# Altium PCB control plate ( mill).pcbdoc
Units mm, origin at the board's own origin, x right, y up, seen from the top; angles counter-clockwise.
Board outline 400 x 240 mm, 2 copper layers (Top Layer, Bottom Layer); 16 components, 0 nets, 12 pads, 0 vias.
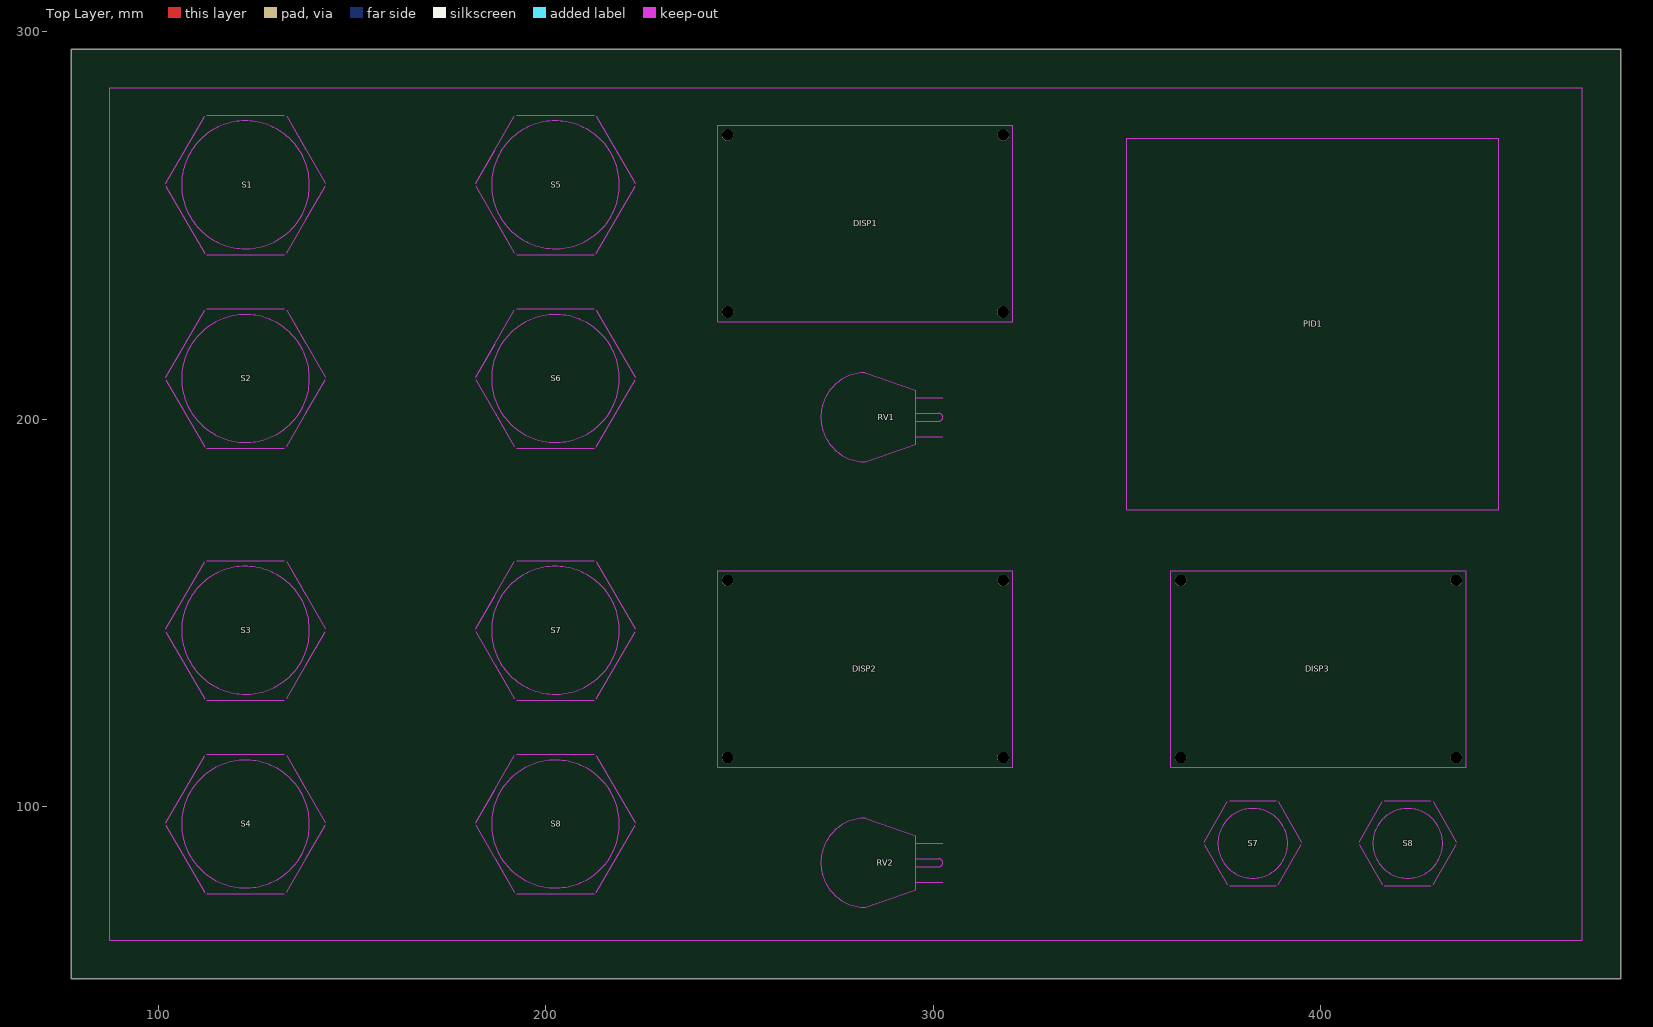
[diagram p0: Top Layer view]
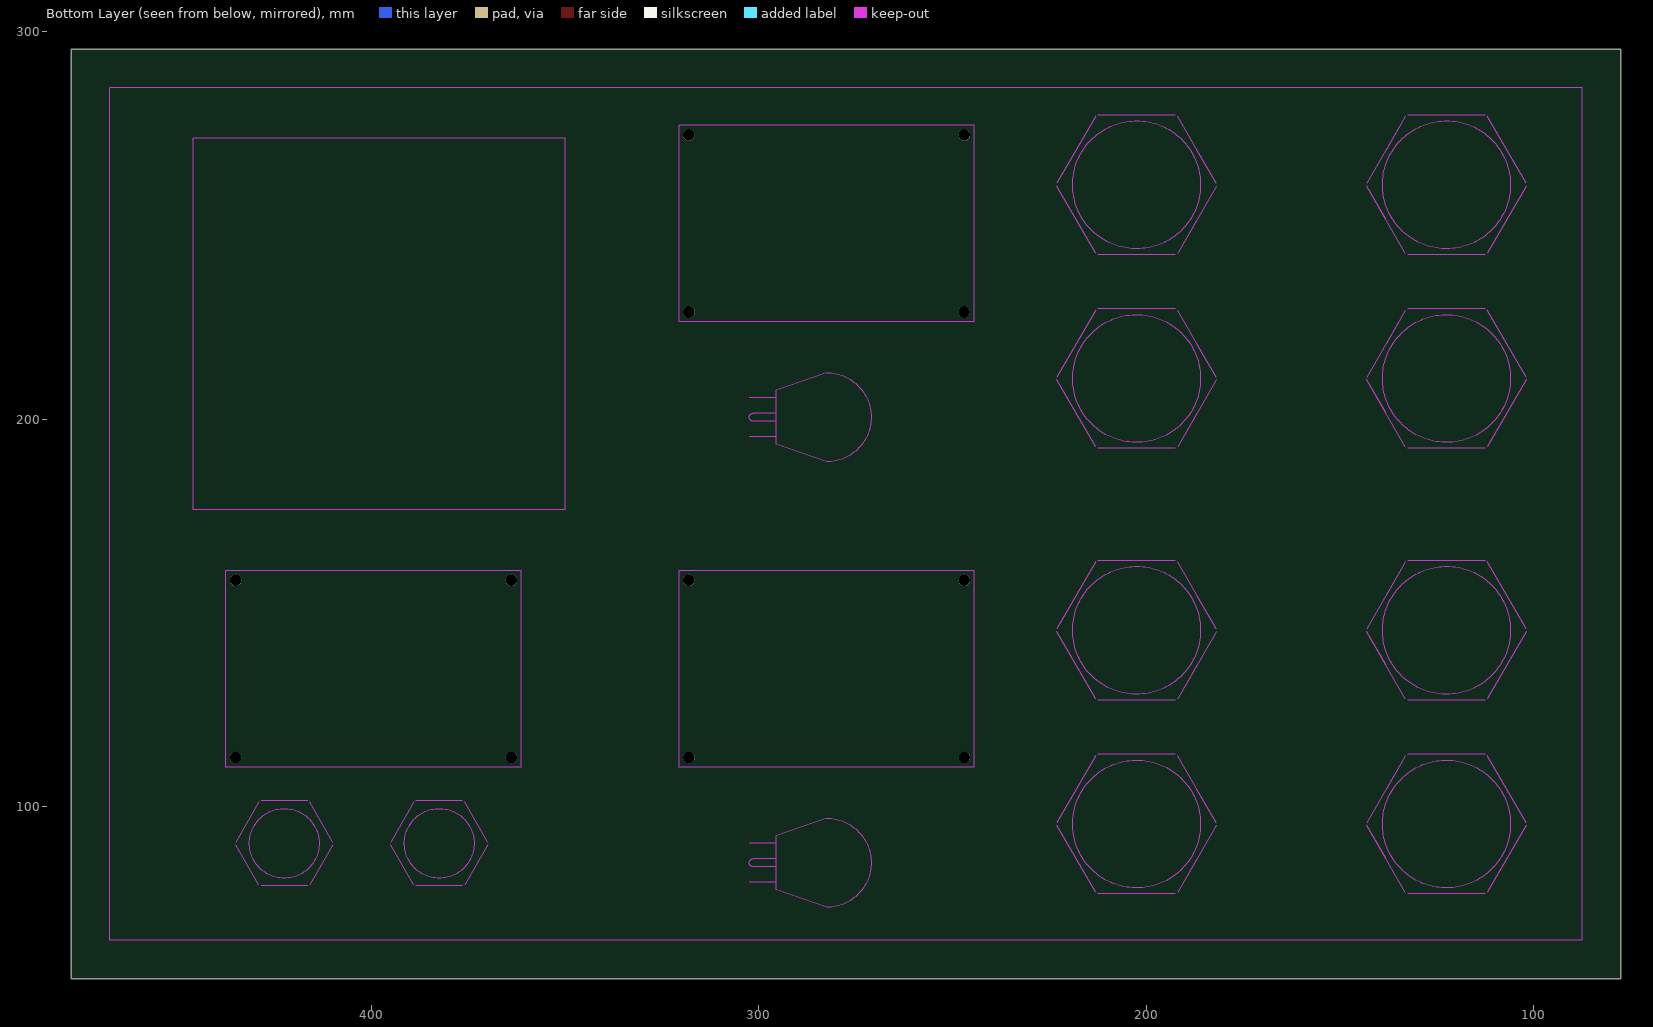
[diagram p1: Bottom Layer view, seen from below]

## Layer stack, top to bottom
Top Layer: signal copper 0.0356
Dielectric: dielectric 0.32, FR-4, Dk 4.8
Bottom Layer: signal copper 0.0356

## Board outline
77.451,55.48 77.451,295.48 477.451,295.48 477.451,55.48

## Design rules (kind name [scope] priority, off if disabled: settings)
Clearance [All] p1: gap=0.254
PolygonConnect [All] p1: connectstyle=Relief reliefconductorwidth=0.254 reliefentries=4 polygonreliefangle="90 Angle"
RoutingVias [All] p1: holewidth=0.711 width=1.27 viastyle="Through Hole" minholewidth=0.711 minwidth=1.27 maxholewidth=0.711 maxwidth=1.27
SilkscreenOverComponentPads [All] p1: minsilkscreentomaskgap=0.254
SolderMaskExpansion [All] p1: expansion=0.102
Width [All] p1: maxlimit=0.254 minlimit=0.254 preferedwidth=0.254
27 further rules are at their usual default settings.

## Components (designator, comment, footprint, x,y, rotation, side; value= is the part's Value field where it differs from the comment)
DISP1 "Comment" "DISPLAY MODULE" 282.451,250.48 r0 top
DISP2 "Comment" "DISPLAY MODULE" 282.451,135.48 r0 top
DISP3 "Comment" "DISPLAY MODULE" 399.415,135.48 r0 top
PID1 "Comment" "PID CONTROLLER" 397.891,224.536 r0 top
RV1 "Comment" POTENTIOMETER 282.451,200.48 r90 top
RV2 "Comment" POTENTIOMETER 282.451,85.48 r90 top
S1 "Comment" "33MM BUTTON" 122.451,260.48 r0 top
S2 "Comment" "33MM BUTTON" 122.451,210.48 r0 top
S3 "Comment" "33MM BUTTON" 122.451,145.48 r0 top
S4 "Comment" "33MM BUTTON" 122.451,95.48 r0 top
S5 "Comment" "33MM BUTTON" 202.451,260.48 r0 top
S6 "Comment" "33MM BUTTON" 202.451,210.48 r0 top
S7 "Comment" "33MM BUTTON" 202.451,145.48 r0 top
S7 "Comment" "18MM BUTTON" 382.451,90.48 r0 top
S8 "Comment" "33MM BUTTON" 202.451,95.48 r0 top
S8 "Comment" "18MM BUTTON" 422.451,90.48 r0 top

## Footprints (in the part's own frame and the unit in brackets; to place one, negate y for a bottom-side part, rotate by r counter-clockwise, add the part's x,y. Pads: shape width x height; smd on the part's side, far side on the other; paste and mask are expansions set on the pad)
"18MM BUTTON" [mm] "BUGLIN MP0045/1D2"
  Keep-Out Layer circle w0.254: c0,0 r9
  Keep-Out Layer lines w0.254: -12.526,-0.304 -6.526,-10.696 ; -12.526,0.304 -6.526,10.696 ; -6,-11 6,-11 ; -6,11 6,11 ; 6.526,-10.696 12.526,-0.304 ; 6.526,10.696 12.526,0.304
"33MM BUTTON" [mm]
  Keep-Out Layer circle w0.254: c0,0 r16.5
  Keep-Out Layer lines w0.254: -20.588,-0.34 -10.588,-17.66 -15.588,-9 ; -15.588,9 -20.588,0.34 -10.588,17.66 ; -10,-18 10,-18 0,-18 ; 0,18 -10,18 10,18 ; 10.588,-17.66 20.588,-0.34 15.588,-9 ; 15.588,9 10.588,17.66 20.588,0.34
"DISPLAY MODULE" [mm]
  Keep-Out Layer lines w0.254: -38.1,-25.375 -38.1,25.425 38.1,25.425 38.1,-25.375 -38.1,-25.375
"PID CONTROLLER" [mm] "SHIMADEN SR23 SERIES CONTROLLER"
  Keep-Out Layer lines w0.254: -48,-48 -48,48 48,48 48,-48 -48,-48
POTENTIOMETER [mm] "TYCO TW1103KA (Farnell 1502913)"
  Keep-Out Layer lines w0.254: -1,-13 -1,-18 -1,-19 ccw(c0,-19) 1,-19 1,-13 ; -5,-20 -5,-13 0,-13 5,-13 5,-20 ; -11.5,0 cw(c0,0) 11.5,0 7,-13 -7,-13 -11.5,0

## Free pads (board coordinates)
  round 3 hole 3 unplated: 0(246.888,158.355) 0(246.888,273.355) 0(318.03,158.355) 0(318.03,273.355) 0(363.852,158.355) 0(434.994,158.355) 1(246.888,112.635) 1(246.888,227.635) 1(363.852,112.635) 2(318.008,112.635) 2(318.008,227.635) 2(434.972,112.635)

## Nets (pads, with @x,y where several pads share a name; then routed paths per layer and width w, separated by ;. In a path a pad name is that pad's centre, name@x,y a point inside that pad or via, vN(x,y) a via of type N, cw(c..) or ccw(c..) an arc to the next point about the centre after c; other vN are vias at no path point)

## Keep-outs
Keep-Out Layer:
  lines w0.254: 87.451,65.48 467.451,65.48 467.451,285.48 87.451,285.48 87.451,65.48

## Silkscreen, mask and mechanical layers (free items; w line width, h text height)
Mechanical 1:
  lines w0.254: 252.459,275.151 252.476,275.151 252.476,295.48 ; 252.476,55.48 252.459,55.48 252.459,294.894 252.476,294.894 ; 77.451,55.48 477.451,55.48 477.451,295.48 77.451,295.48 77.451,55.48
Mechanical 2:
  the board outline again, w0.254
Mechanical 3:
  text "COOLING FAN" at 102.451,282.98 h10
  text "ROASTING DRUM" at 174.951,282.98 h10
  text "DRUM SPEED RPM" at 262.451,240.48 h5
  text "START" at 112.451,232.98 h10
  text "START" at 192.451,232.98 h10
  text "STOP" at 112.451,182.98 h10
  text "STOP" at 192.451,182.98 h10
  text "DRUM SPEED CONTROL" at 252.451,180.48 h10
  text "ROASTING FAN" at 99.951,167.98 h10
  text "STIRRER" at 187.451,167.98 h10
  text "STIRRER SPEED RPM" at 262.451,125.48 h5
  text "ELAPSED TIME, HH:MM" at 379.951,125.48 h5
  text "START" at 112.451,120.48 h10
  text "START" at 192.451,120.48 h10
  text "START" at 377.451,105.48 h5
  text "STOP" at 417.451,105.48 h5
  text "PAUSE" at 377.451,75.48 h5
  text "RESET" at 417.451,75.48 h5
  text "STOP" at 112.451,70.48 h10
  text "STOP" at 194.951,70.48 h10
  text "STIRRER SPEED CONTROL" at 249.951,65.48 h10
Mechanical 4:
  lines w0.254: 248.92,20.32 20.32,20.32 20.32,325.12 248.92,325.12 ; 248.92,20.32 248.92,325.12 ; 248.92,20.32 477.52,20.32 477.52,325.12 248.92,325.12

## Text inside footprints (layer, text, board x,y; h text height)
DISP1: Mechanical 1 "CUT OUT" at 266.451,255.48 h5; Mechanical 2 "CUT OUT" at 266.201,247.98 h5
DISP2: Mechanical 1 "CUT OUT" at 266.451,140.48 h5; Mechanical 2 "CUT OUT" at 266.201,132.98 h5
DISP3: Mechanical 1 "CUT OUT" at 383.415,140.48 h5; Mechanical 2 "CUT OUT" at 383.165,132.98 h5
PID1: Mechanical 1 "CUT OUT" at 381.891,225.536 h5; Mechanical 2 "CUT OUT" at 382.641,216.536 h5
RV1: Mechanical 1 "CUT" at 281.451,197.73 h2 r90; Mechanical 1 "OUT" at 285.451,197.73 h2 r90; Mechanical 2 "CUT OUT" at 292.701,190.23 h3 r90
RV2: Mechanical 1 "CUT" at 281.451,82.73 h2 r90; Mechanical 1 "OUT" at 285.451,82.73 h2 r90; Mechanical 2 "CUT OUT" at 292.701,75.23 h3 r90
S1: Mechanical 1 "CUT OUT" at 112.701,259.23 h3; Mechanical 2 "CUT OUT" at 106.701,253.98 h5
S2: Mechanical 1 "CUT OUT" at 112.701,209.23 h3; Mechanical 2 "CUT OUT" at 106.701,203.98 h5
S3: Mechanical 1 "CUT OUT" at 112.701,144.23 h3; Mechanical 2 "CUT OUT" at 106.701,138.98 h5
S4: Mechanical 1 "CUT OUT" at 112.701,94.23 h3; Mechanical 2 "CUT OUT" at 106.701,88.98 h5
S5: Mechanical 1 "CUT OUT" at 192.701,259.23 h3; Mechanical 2 "CUT OUT" at 186.701,253.98 h5
S6: Mechanical 1 "CUT OUT" at 192.701,209.23 h3; Mechanical 2 "CUT OUT" at 186.701,203.98 h5
S7: Mechanical 1 "CUT OUT" at 192.701,144.23 h3; Mechanical 2 "CUT OUT" at 186.701,138.98 h5
S7: Mechanical 1 "CUT OUT" at 375.951,89.48 h2; Mechanical 2 "CUT OUT" at 375.951,86.48 h2
S8: Mechanical 1 "CUT OUT" at 192.701,94.23 h3; Mechanical 2 "CUT OUT" at 186.701,88.98 h5
S8: Mechanical 1 "CUT OUT" at 415.951,89.48 h2; Mechanical 2 "CUT OUT" at 415.951,86.48 h2